# EAGLE board eRIC_HAT (EAGLE 7.0.0)
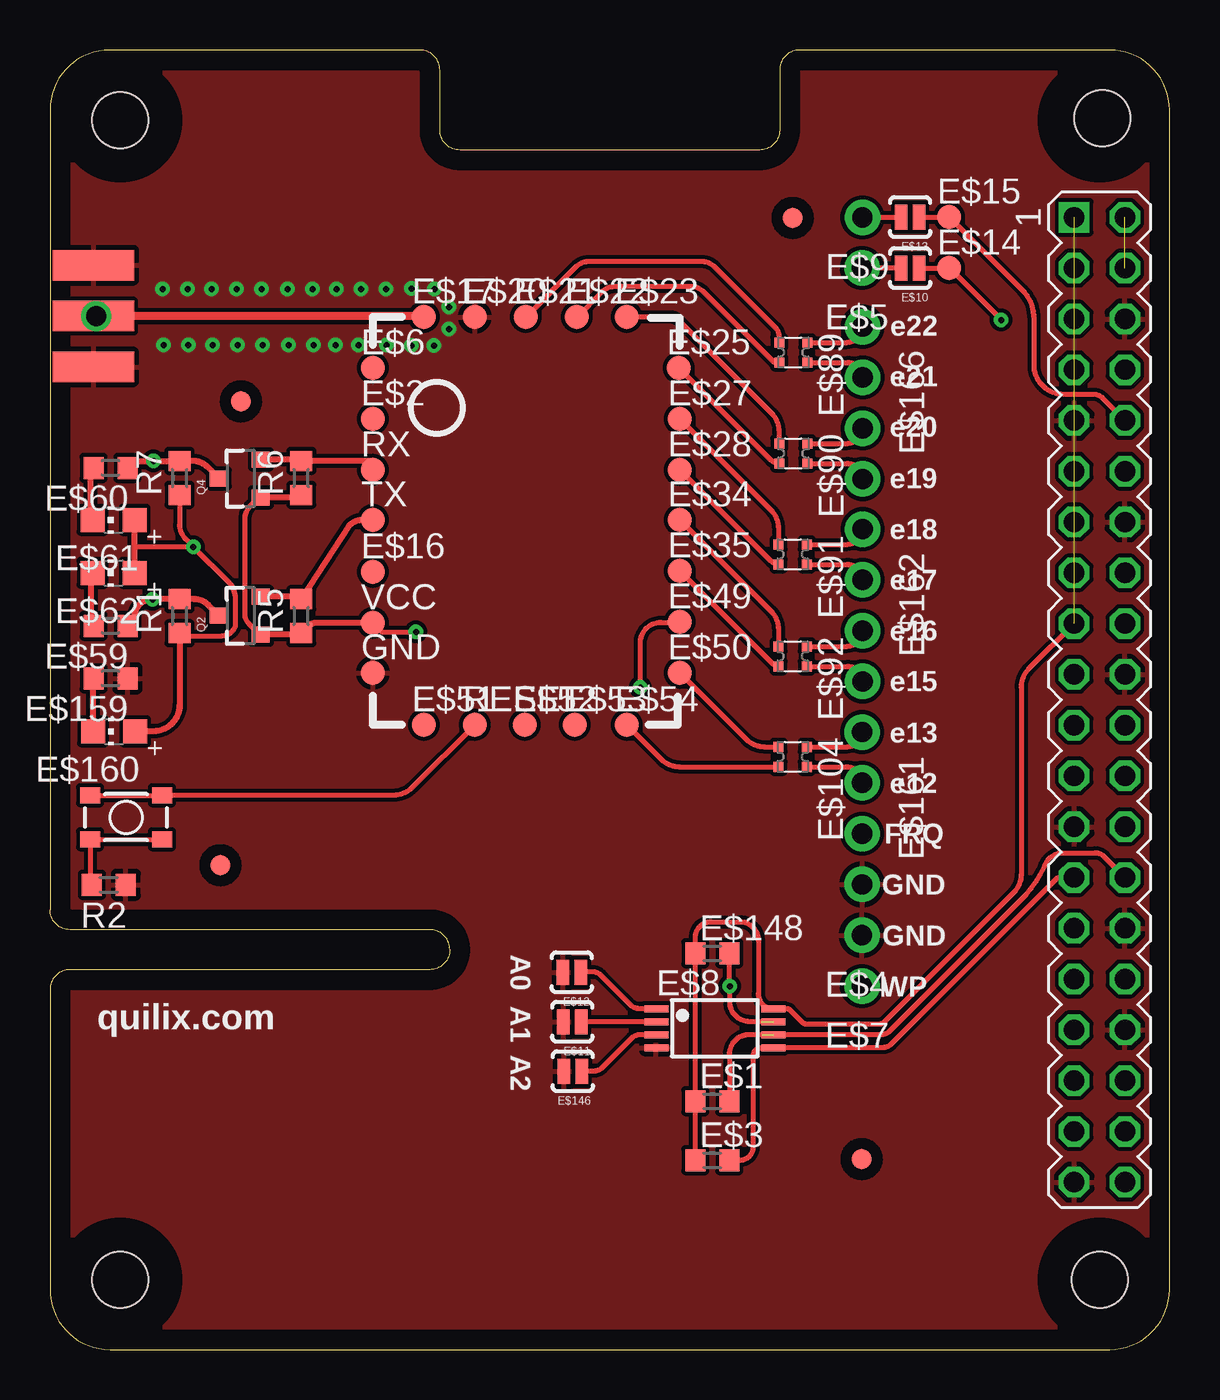
[diagram p0: board, top side]
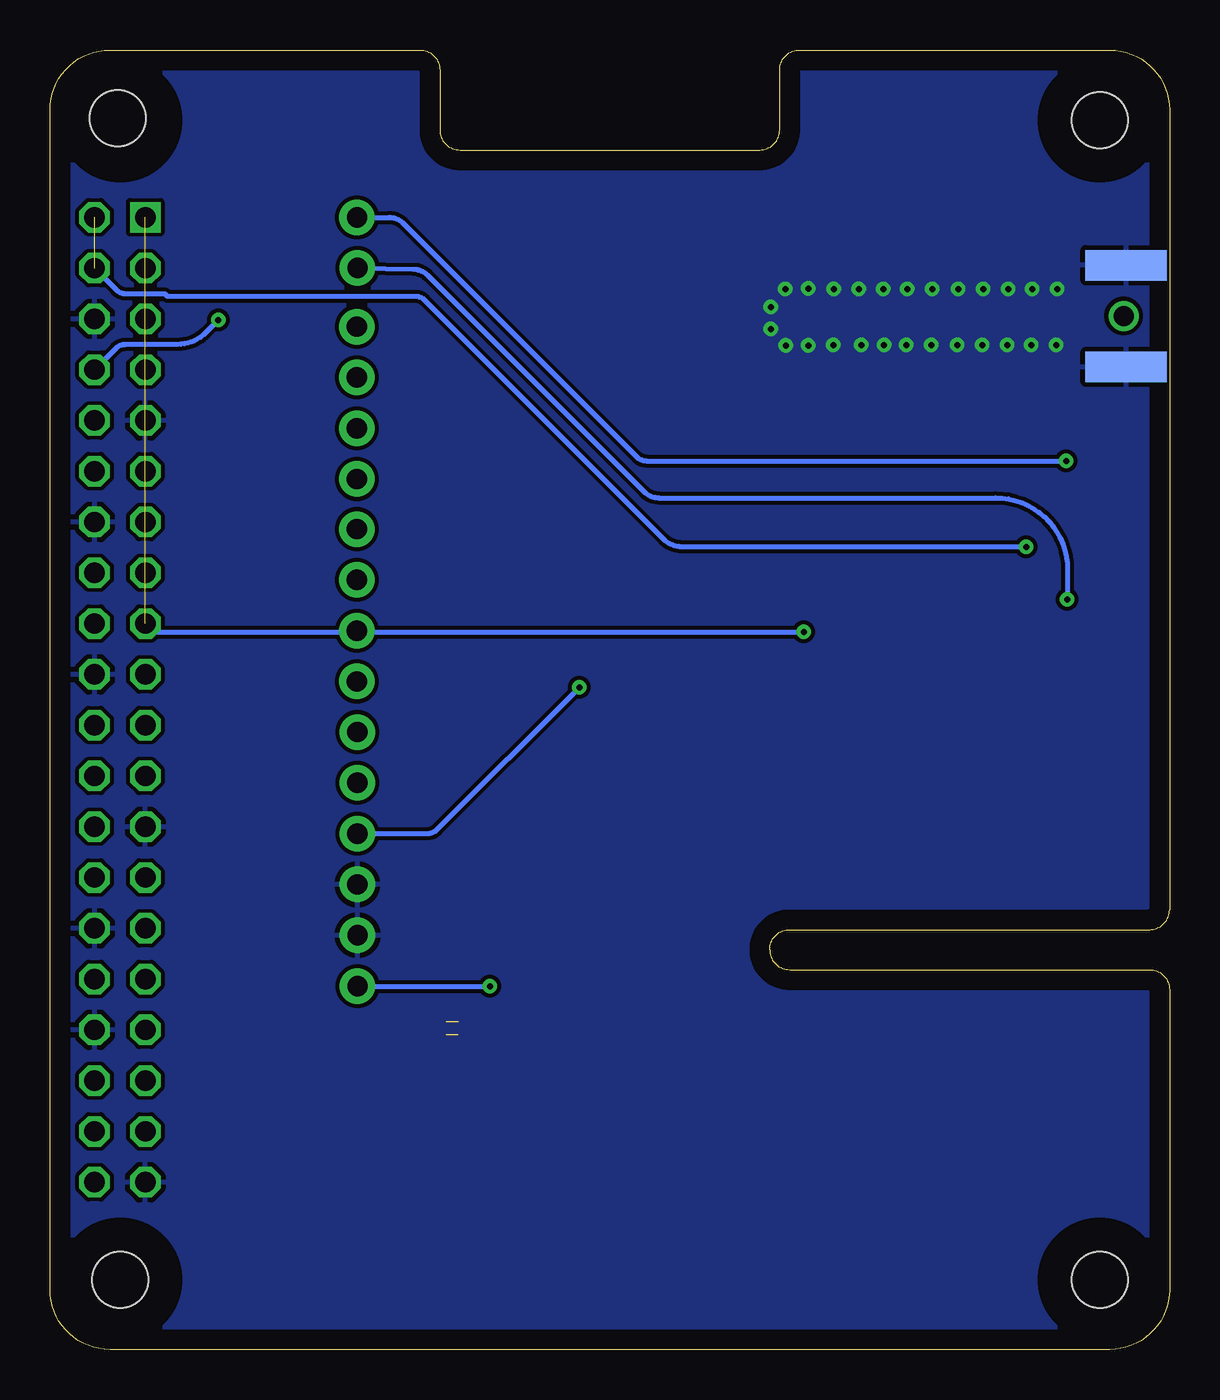
[diagram p1: board, bottom side, seen from below]

Size 56 x 65 mm. Coordinates in mm from the lower left corner, seen from the top.
Outline: 3,65 arc90 0,62 0,22 arc90 1,21 19,21 arc-90 20,20 arc-90 19,19 1,19 arc90 0,18 0,3 arc90 3,0 53,0 arc90 56,3 56,62 arc90 53,65 37.5,65 arc90 36.5,64 36.5,61 arc-90 35.5,60 20.5,60 arc-90 19.5,61 19.5,64 arc90 18.5,65 3,65
Copper layers (1*16): Top 0.035mm / dielectric 1.5mm / Bottom 0.035mm
Design rules "default *": minimum track width 10mil, minimum drill 24mil, track to track 8mil, track to pad 8mil, pad to pad 8mil, via to via 8mil, smd to smd 8mil, copper to edge 40mil, drill to drill 8mil, minimum pad ring 10mil, minimum via ring 8mil, stop-mask expansion 4mil, vias tented up to drill 0.3mm, thermal gap 10mil
Holes 2.8 mm at 3.5,61.5 52.5,3.5 3.5,3.5 52.62,61.6
tRestrict: area 51,60 to 54,63.1; area 51,2 to 54,5.1; area 2,2 to 5.1,5.1; area 2,60 to 5.1,63.1
bRestrict: area 2,60 to 5.1,63.1; area 51,60 to 54,63.1; area 2,2 to 5.1,5.1; area 51,2 to 54,5.1

## Footprints (pad centres in the part's own frame; a part is rotated, then mirrored left to right if it is on the bottom)
R0603 = smd 1 x 1.1: 1 -0.85,0; 2 0.85,0
TP12R = smd 1.2 x 1.2: TP 0,0
1X01-CLEANBIG = drill 1.016 pad 1.778: 1 0,0
TSSOP8 = smd 1.2 x 0.35: 1 -2.925,0.975; 2 -2.925,0.325; 3 -2.925,-0.325; 4 -2.925,-0.975; 5 2.925,-0.975; 6 2.925,-0.325; 7 2.925,0.325; 8 2.925,0.975
SJ_2S-NO = smd 0.635 x 1.27: 1 -0.45,0; 2 0.45,0
SMA-EDGE = smd 1.524 x 4.064: GND@0 0,0; GND@1 5.08,0; SIG 2.54,0 | smd 1.524 x 4.064 bottom: GND@2 0,0; GND@3 5.08,0
TACTILE_SWITCH_SMD-3 = smd 1 x 0.8: 1 -1.8,1.1; 2 1.8,1.1; 3 -1.8,-1.1; 4 1.8,-1.1
FIDUCIAL_1MM = smd 1 x 1: 1 0,0
CHIP-LED0805 = smd 1.2 x 1.2: A 0,-1.05; C 0,1.05
EXB34V = smd 0.5 x 0.5: 1 -0.5,-0.7; 2 0.5,-0.7; 3 0.5,0.7; 4 -0.5,0.7
1X04-CLEANBIG = drill 1.016 pad 1.778: 1 -3.81,0; 2 -1.27,0; 3 1.27,0; 4 3.81,0
PIN_20X2 = drill 1.016 square: 1 -24.13,-1.27 | drill 1.016 octagon: 2 -24.13,1.27; 3 -21.59,-1.27; 4 -21.59,1.27; 5 -19.05,-1.27; 6 -19.05,1.27; 7 -16.51,-1.27; 8 -16.51,1.27; 9 -13.97,-1.27; 10 -13.97,1.27; 11 -11.43,-1.27; 12 -11.43,1.27; 13 -8.89,-1.27; 14 -8.89,1.27; 15 -6.35,-1.27; 16 -6.35,1.27; 17 -3.81,-1.27; 18 -3.81,1.27; 19 -1.27,-1.27; 20 -1.27,1.27; 21 1.27,-1.27; 22 1.27,1.27; 23 3.81,-1.27; 24 3.81,1.27; 25 6.35,-1.27; 26 6.35,1.27; 27 8.89,-1.27; 28 8.89,1.27; 29 11.43,-1.27; 30 11.43,1.27; 31 13.97,-1.27; 32 13.97,1.27; 33 16.51,-1.27; 34 16.51,1.27; 35 19.05,-1.27; 36 19.05,1.27; 37 21.59,-1.27; 38 21.59,1.27; 39 24.13,-1.27; 40 24.13,1.27
SOT23-3 = smd 0.8 x 0.9: 1 -0.95,-1; 2 0.95,-1; 3 0,1.1

## Placement (x,y rotation side)
E$1  [R0603]  33.12,12.41 0 top
E$2  [TP12R]  16.15,46.55 0 top
E$3  [R0603]  33.12,9.46 0 top
E$4  [1X01-CLEANBIG]  40.62,20.73 180 top
E$5  [1X01-CLEANBIG]  40.62,54.1 180 top
E$6  [TP12R]  16.15,49.1 0 top
E$7  [1X01-CLEANBIG]  40.62,18.18 180 top
E$8  [TSSOP8]  33.25,16.08 0 top
E$9  [1X01-CLEANBIG]  40.64,56.62 180 top
E$10  [SJ_2S-NO]  43.02,54.09 180 top
E$11  [SJ_2S-NO]  26.12,16.39 180 top
E$12  [SJ_2S-NO]  26.1,18.87 180 top
E$13  [SJ_2S-NO]  43.02,56.64 180 top
E$14  [TP12R]  44.98,54.1 0 top
E$15  [TP12R]  44.98,56.65 0 top
E$16  [TP12R]  16.15,38.9 0 top
E$17  [TP12R]  18.7,51.65 0 top
E$20  [TP12R]  21.25,51.65 0 top
E$21  [TP12R]  23.8,51.65 0 top
E$22  [TP12R]  26.35,51.65 0 top
E$23  [TP12R]  28.85,51.65 0 top
E$25  [TP12R]  31.45,49.1 0 top
E$27  [TP12R]  31.5,46.55 0 top
E$28  [TP12R]  31.5,44 0 top
E$34  [TP12R]  31.5,41.5 0 top
E$35  [TP12R]  31.5,38.95 0 top
E$49  [TP12R]  31.5,36.4 0 top
E$50  [TP12R]  31.5,33.85 0 top
E$51  [TP12R]  18.7,31.25 0 top
E$52  [TP12R]  23.75,31.25 0 top
E$53  [TP12R]  26.25,31.25 0 top
E$54  [TP12R]  28.85,31.25 0 top
E$55  [SMA-EDGE]  2.18,49.15 90 top
E$56  [TACTILE_SWITCH_SMD-3]  3.8,26.62 180 top
E$57  [FIDUCIAL_1MM]  9.55,47.43 180 top
E$58  [FIDUCIAL_1MM]  40.6,9.53 180 top
E$59  [R0603]  3.02,36.2 180 top
E$60  [R0603]  3.02,44.1 180 top
E$61  [CHIP-LED0805]  3.18,41.5 90 top
E$62  [CHIP-LED0805]  3.18,38.85 90 top
E$65  [FIDUCIAL_1MM]  37.15,56.6 180 top
E$69  [FIDUCIAL_1MM]  8.53,24.23 180 top
E$89  [EXB34V]  37.18,49.88 270 top
E$90  [EXB34V]  37.18,44.83 270 top
E$91  [EXB34V]  37.15,39.77 270 top
E$92  [EXB34V]  37.15,34.68 270 top
E$104  [EXB34V]  37.15,29.65 270 top
E$146  [SJ_2S-NO]  26.15,13.91 180 top
E$148  [R0603]  33.12,19.82 0 top
E$159  [R0603]  3.02,33.58 180 top
E$160  [CHIP-LED0805]  3.2,30.93 90 top
E$161  [1X04-CLEANBIG]  40.62,27.08 270 top
E$162  [1X04-CLEANBIG]  40.65,37.23 270 top
E$166  [1X04-CLEANBIG]  40.65,47.35 270 top
GND  [TP12R]  16.15,33.85 0 top
K1  PIN20X2  [PIN_20X2]  52.5,32.5 270 top
Q2  BSS138  [SOT23-3]  9.55,36.71 90 top
Q4  BSS138  [SOT23-3]  9.55,43.57 90 top
R1  10K  [R0603]  6.48,36.68 90 top
R2  10K  [R0603]  2.94,23.24 180 top
R5  10K  [R0603]  12.56,36.68 90 top
R6  10K  [R0603]  12.56,43.59 90 top
R7  10K  [R0603]  6.48,43.59 90 top
RESET  [TP12R]  21.25,31.25 0 top
RX  [TP12R]  16.15,44 0 top
TX  [TP12R]  16.15,41.5 0 top
VCC  [TP12R]  16.15,36.35 0 top

## Library data of the parts
E$1 E$3 E$148 = eagle-ltspice
E$2 E$6 E$14-E$17 E$20-E$23 E$25 E$27 E$28 E$34 E$35 E$49-E$54 GND RESET RX TX VCC = testpad
E$4 E$5 E$7 E$9 E$57-E$62 E$65 E$69 E$159-E$162 E$166 R1 R2 R5-R7 = adafruit
E$8 = memory
E$10-E$13 E$146 = SparkFun-Capacitors
E$55 = SparkFun-Connectors
E$56 = SparkFun-Electromechanical
E$89-E$92 E$104 = resistor-dil
K1 = FLYFISH
Q2 Q4 = SparkFun

## Nets
+3V3: E$1.1 E$3.1 E$8.8 E$148.1 K1.1 K1.17 Q2.1 Q4.1 R5.1 R6.1 VCC.TP
+5V: E$61.A E$62.A E$160.A K1.2 K1.4 R1.1 R7.1
ANT: E$17.TP E$55.SIG
GND: E$4.1 E$8.4 E$11.2 E$12.2 E$20.TP E$55.GND@0 E$55.GND@1 E$55.GND@2 E$55.GND@3 E$146.2 E$159.1 E$161.4 GND.TP K1.6 K1.9 K1.14 K1.20 K1.25 K1.30 K1.34 K1.39 R2.1
S$6: E$51.TP
S$7: E$8.3 E$146.1
S$8: E$49.TP E$161.3
S$11: E$34.TP E$92.1
S$14: E$56.3 E$56.4 RESET.TP
S$17: E$60.2 E$61.C
S$21: E$56.1 E$56.2 R2.2
S$22: E$8.2 E$11.1
S$23: E$8.1 E$12.1
S$25: E$5.1 E$10.2 E$59.1 Q2.3 R1.2
S$28: E$2.TP
S$30: E$9.1 E$13.2 E$60.1 Q4.3 R7.2
S$38: E$159.2 E$160.C
S$39: Q4.2 R6.2 RX.TP
S$43: E$59.2 E$62.C
S$44: E$16.TP
S$45: E$89.3 E$166.2
S$46: E$90.4 E$166.3
S$47: E$90.3 E$166.4
S$48: Q2.2 R5.2 TX.TP
S$49: E$89.4 E$166.1
S$50: E$13.1 E$15.TP K1.10
S$51: E$91.4 E$162.1
S$52: E$91.3 E$162.2
S$53: E$92.4 E$162.3
S$54: E$92.3 E$162.4
S$55: E$21.TP E$89.1
S$56: E$22.TP E$89.2
S$57: E$23.TP E$90.1
S$58: E$25.TP E$90.2
S$59: E$27.TP E$91.1
S$60: E$28.TP E$91.2
S$61: E$35.TP E$92.2
S$62: E$50.TP E$104.1
S$63: E$54.TP E$104.2
S$64: E$104.3 E$161.2
S$65: E$104.4 E$161.1
S$70: E$10.1 E$14.TP K1.8
SCL: E$1.2 E$8.6 K1.28
SDA: E$3.2 E$8.5 K1.27
WP: E$7.1 E$8.7 E$148.2

## Tracks (layer width: path | path; a pad name or v marks a point on that pad's centre or on a via)
+3V3  (via drill 0.3)  (1 unrouted)
  Top 0.254: 10.34,35.83 10.52,35.73 9.97,36.29 arc-45 9.75,36.74 9.75,41.54 arc-45 10.07,42.24 10.45,42.62 | VCC.TP 16.6,35.9 v18.3,35.9 | E$3.1 E$1.1 E$148.1 32.27,20.6 arc-90 33.08,21.4 34.5,21.4 arc-90 35.43,20.48 35.43,17.8 arc90 E$8.8 | K1.17 48.95,34.03 arc45 48.58,33.13 48.58,23.75 arc-45 48.2,22.85 41.72,16.37 arc-45 41.49,16.28 37.83,16.28 arc-45 37.65,16.35 37.02,16.98 arc45 36.84,17.05 E$8.8 | 36.2,17.03 E$8.8
  Top 0.305: Q2.1 12.49,35.76 R5.1 12.89,36.16 arc-45 13.34,36.35 VCC.TP | R6.1 12.54,42.62 Q4.1 10.45,42.62
  Top 0.406: 10.52,35.73 Q2.1 | 10.67,42.74 Q4.1
  Bottom 0.254: v18.3,35.9 18.33,35.88 50.8,35.88 K1.17
+5V  (via drill 0.3)  (1 unrouted)
  Top 0.254: 6.82,35.8 R1.1 | 6.92,35.7 8.6,35.7 arc45 9.03,35.86 arc45 9.28,36.21 9.28,37.54 arc45 8.98,38.34 v7.17,40.15 | v7.17,40.15 4.22,40.15 | R7.1 6.48,41.26 arc45 6.78,40.55 v7.17,40.15
  Top 0.305: 6.82,35.8 6.92,35.7 | E$62.A 4.22,40.15 E$61.A | R1.1 6.48,32.23 arc-90 5.18,30.93 E$160.A
  Top 0.406: R1.1
  Bottom 0.254: v7.17,40.15 24.4,40.15 arc45 25.3,40.52 37.26,52.49 arc-45 37.71,52.68 50.12,52.68 50.25,52.8 52.22,52.8 arc45 52.67,52.99 K1.4
ANT
  Top 0.406: E$17.TP arc45 18.6,51.69 E$55.SIG
GND  (via drill 0.3)
  other vias: 18.08,53.08 16.8,53.05 15.55,53.05 14.32,53.05 13.12,53.05 11.88,53.05 10.57,53.05 9.32,53.05 8.07,53.05 6.88,53.05 5.62,53.05 5.68,50.25 6.92,50.25 8.12,50.25 9.38,50.25 10.62,50.25 11.92,50.25 13.17,50.25 14.28,50.25 15.42,50.25 16.83,50.25 18.08,50.23 19.95,51.05 19.95,52.15 19.23,53.05 19.2,50.23
  pour Bottom: 3,65 arc90 0,62 0,22 arc90 1,21 19,21 arc-90 20,20 arc-90 19,19 1,19 arc90 0,18 0,3 arc90 3,0 53,0 arc90 56,3 56,62 arc90 53,65 37.5,65 arc90 36.5,64 36.5,61 arc-90 35.5,60 20.5,60 arc-90 19.5,61 19.5,64 arc90 18.5,65
  pour Top: 3,65 arc90 0,62 0,22 arc90 1,21 19,21 arc-90 20,20 arc-90 19,19 1,19 arc90 0,18 0,3 arc90 3,0 53,0 arc90 56,3 56,62 arc90 53,65 37.5,65 arc90 36.5,64 36.5,61 arc-90 35.5,60 20.5,60 arc-90 19.5,61 19.5,64 arc90 18.5,65
S$7
  Top 0.254: E$8.3 29.54,15.75 arc45 29.09,15.56 27.64,14.11 arc-45 27.19,13.92 26.61,13.92 E$146.1
S$8  (via drill 0.3)
  Top 0.254: v29.53,33.12 29.53,35.33 arc-90 30.58,36.38 31.48,36.38 arc90 E$49.TP
  Bottom 0.254: E$161.3 37.11,25.8 arc-45 36.66,25.99 v29.53,33.12
S$11
  Top 0.254: E$92.1 36.45,36.02 arc45 36.08,36.92 E$34.TP
S$14
  Top 0.254: E$56.4 E$56.3 17.2,27.73 arc45 18.1,28.1 RESET.TP
S$17
  Top 0.305: E$61.C arc-90 2.02,41.25 2.02,43.95 E$60.2
S$21
  Top 0.254: E$56.1 E$56.2 2,23.33 R2.2
S$22
  Top 0.254: E$8.2 26.6,16.4 arc45 E$11.1
S$23
  Top 0.254: E$8.1 29.49,17.05 arc-45 29.04,17.24 27.56,18.71 arc45 27.11,18.9 26.59,18.9 E$12.1
S$25  (via drill 0.3)
  Top 0.254: E$10.2 arc45 42.55,54.1 E$5.1 | E$59.1 4.2,35.87 | v5.12,37.52 5.13,37.53
  Top 0.305: Q2.3 7.92,37.24 arc45 7.21,37.53 R1.2 5.13,37.53 arc90 4.2,36.6 4.2,36.52 arc-90 E$59.1
  Bottom 0.254: v5.12,37.52 arc-4 5.11,37.63 5.11,39.3 arc-85 8.71,42.6 25.56,42.6 arc45 26.27,42.89 37.12,53.74 arc-44 37.8,54.03 E$5.1
S$30  (via drill 0.3)
  Top 0.254: E$13.2 arc-45 42.54,56.62 E$9.1
  Top 0.305: Q4.3 7.87,44.15 arc45 7.16,44.44 R7.2 v5.18,44.44 | 4.22,44.44 v5.18,44.44 | v5.18,44.45 v5.18,44.44
  Top 0.406: E$60.1 4.22,44.44
  Bottom 0.254: v5.18,44.45 26.19,44.45 arc45 26.64,44.64 38.33,56.33 arc-45 39.04,56.62 E$9.1
S$38
  Top 0.254: 2.15,33.55 arc-90 E$159.2
  Top 0.305: E$160.C 2.15,33.55
S$39
  Top 0.254: 16,44.15 arc45 16,44.15 16,44.44
  Top 0.305: Q4.2 12.49,44.52 R6.2 16,44.44 | RX.TP 16,44.15
  Top 0.406: 10.63,44.44 Q4.2
S$43
  Top 0.305: E$62.C arc90 2.02,38.95 2.02,36.35 E$59.2
S$45
  Top 0.254: E$89.3 39.9,49.38 arc-90 E$166.2
S$46
  Top 0.254: E$90.4 39.9,45.33 arc90 E$166.3
S$47
  Top 0.254: E$90.3 39.87,44.33 arc-90 E$166.4
S$48
  Top 0.305: Q2.2 12.54,37.66 R5.2 14.96,41.21 arc-45 15.67,41.5 TX.TP
  Top 0.406: 10.68,37.53 Q2.2
S$49
  Top 0.254: E$89.4 39.87,50.38 arc90 E$166.1
S$50
  Top 0.254: K1.10 52.65,47.59 arc45 52.2,47.77 50.69,47.77 arc-90 49.23,49.24 49.23,51.57 arc45 48.64,52.99 E$15.TP arc-45 44.95,56.64 E$13.1 | E$13.1 | 43.49,56.62 E$13.1
S$51
  Top 0.254: E$91.4 39.89,40.27 arc90 E$162.1
S$52
  Top 0.254: E$91.3 39.87,39.27 arc-90 E$162.2
S$53
  Top 0.254: E$92.4 39.87,35.18 arc90 E$162.3
S$54
  Top 0.254: E$92.3 39.89,34.18 arc-90 E$162.4
S$55
  Top 0.254: E$89.1 36.48,50.66 arc45 36.29,51.11 33.27,54.13 arc45 32.56,54.43 26.99,54.43 arc45 26.28,54.13 E$21.TP
S$56
  Top 0.254: E$89.2 36.23,49.38 32.72,52.88 arc45 32.01,53.18 28.29,53.18 arc45 27.58,52.88 E$22.TP
S$57
  Top 0.254: E$90.1 36.48,45.92 arc45 36.1,46.82 31.46,51.46 arc45 31.01,51.65 E$23.TP
S$58
  Top 0.254: E$90.2 arc-45 36.05,44.5 E$25.TP
S$59
  Top 0.254: E$91.1 36.45,41.07 arc45 36.08,41.97 E$27.TP
S$60
  Top 0.254: E$91.2 arc-45 36.07,39.43 E$28.TP
S$61
  Top 0.254: E$92.2 arc-45 36.15,34.3 E$35.TP
S$62
  Top 0.254: E$50.TP 34.83,30.52 arc45 35.73,30.15 E$104.1
S$63
  Top 0.254: E$54.TP 30.58,29.52 arc45 31.48,29.15 E$104.2
S$64
  Top 0.254: E$104.3 39.82,29.15 arc-90 E$161.2
S$65
  Top 0.254: E$104.4 39.89,30.15 arc90 E$161.1
S$70  (via drill 0.3)
  Top 0.254: E$10.1 44.99,54.09 arc-45 E$14.TP arc-45 45.02,54.08 47.56,51.54 arc-45 v47.58,51.5
  Bottom 0.254: K1.8 52.69,50.09 arc45 52.24,50.27 49.63,50.27 arc-45 48.21,50.86 v47.58,51.5
S$71  (via drill 1)
  other vias: 2.3,51.7
SCL  (1 unrouted)
  Top 0.254: K1.28 52.72,24.66 arc45 52.27,24.85 50.52,24.85 arc58 49.73,24.12 arc-17 48.81,22.73 42.01,15.94 arc-45 41.56,15.75 E$8.6 | 35.6,15.75 34.98,15.75 arc90 33.98,14.75 E$1.2
SDA
  Top 0.254: E$3.2 arc-90 E$3.2 34.52,9.47 arc90 35.18,10.12 35.18,14.7 arc-90 35.58,15.1 E$8.5 41.64,15.1 arc45 42.09,15.29 50.34,23.54 arc-45 50.52,23.61 K1.27
WP  (via drill 0.3)  (1 unrouted)
  Top 0.254: 33.98,17.98 33.98,18.12 | 33.98,18.12 E$148.2 | 33.98,18.12 arc-90 34.02,18.18 v34,18.18 34,17.4 arc90 35,16.4 35.55,16.4
  Bottom 0.254: E$7.1 v34,18.18

## Text on the board
_tsilk: e22 | e21 | e20 | e19 | e18 | e17 | e16 | e15 | e13 | e12 | FRQ | GND | GND | A0 | WP | quilix.com | A1 | A2